# Altium PCB SpeedControlPID.PcbDoc
Units mil, origin at the board's own origin, x right, y up, seen from the top; angles counter-clockwise.
Board outline 2100 x 2900 mil, 2 copper layers (Top Layer, Bottom Layer); 54 components, 40 nets, 190 pads, 103 vias.
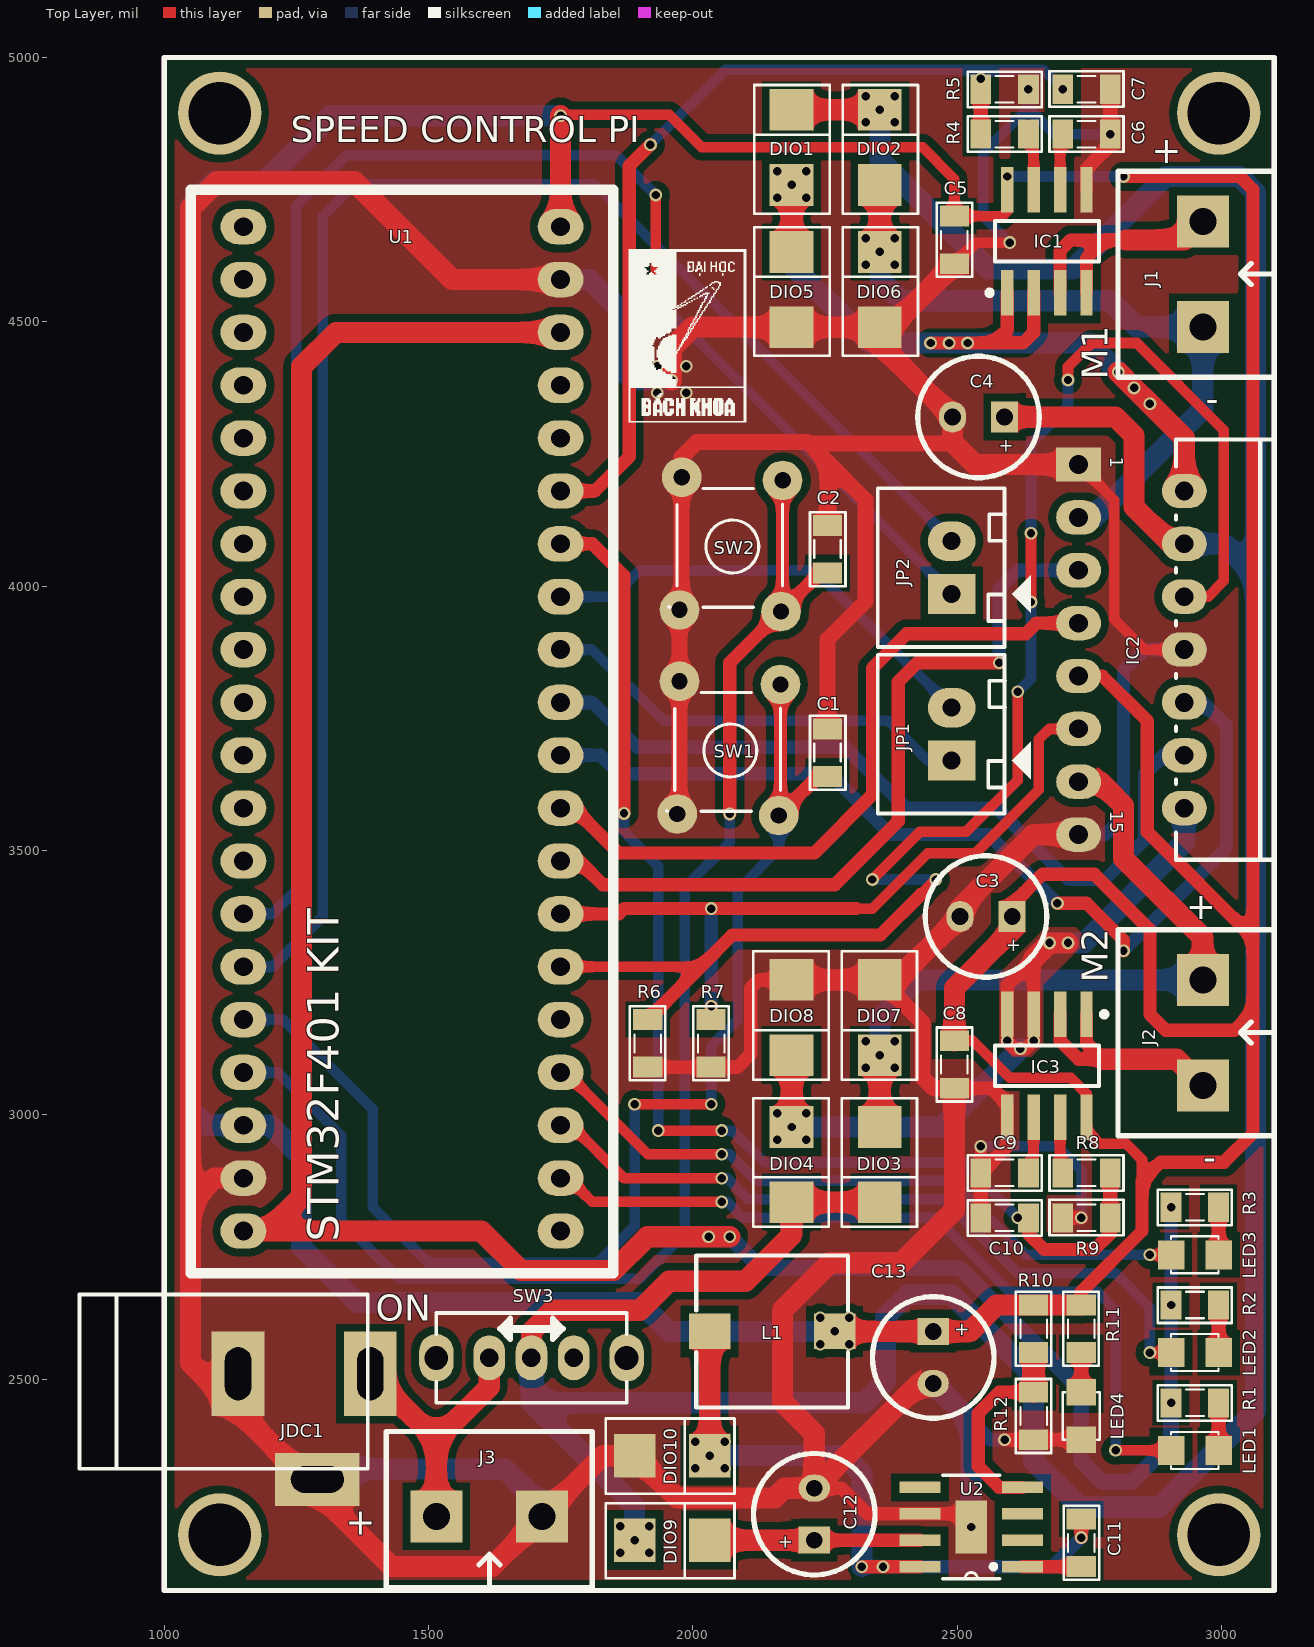
[diagram p0: Top Layer view]
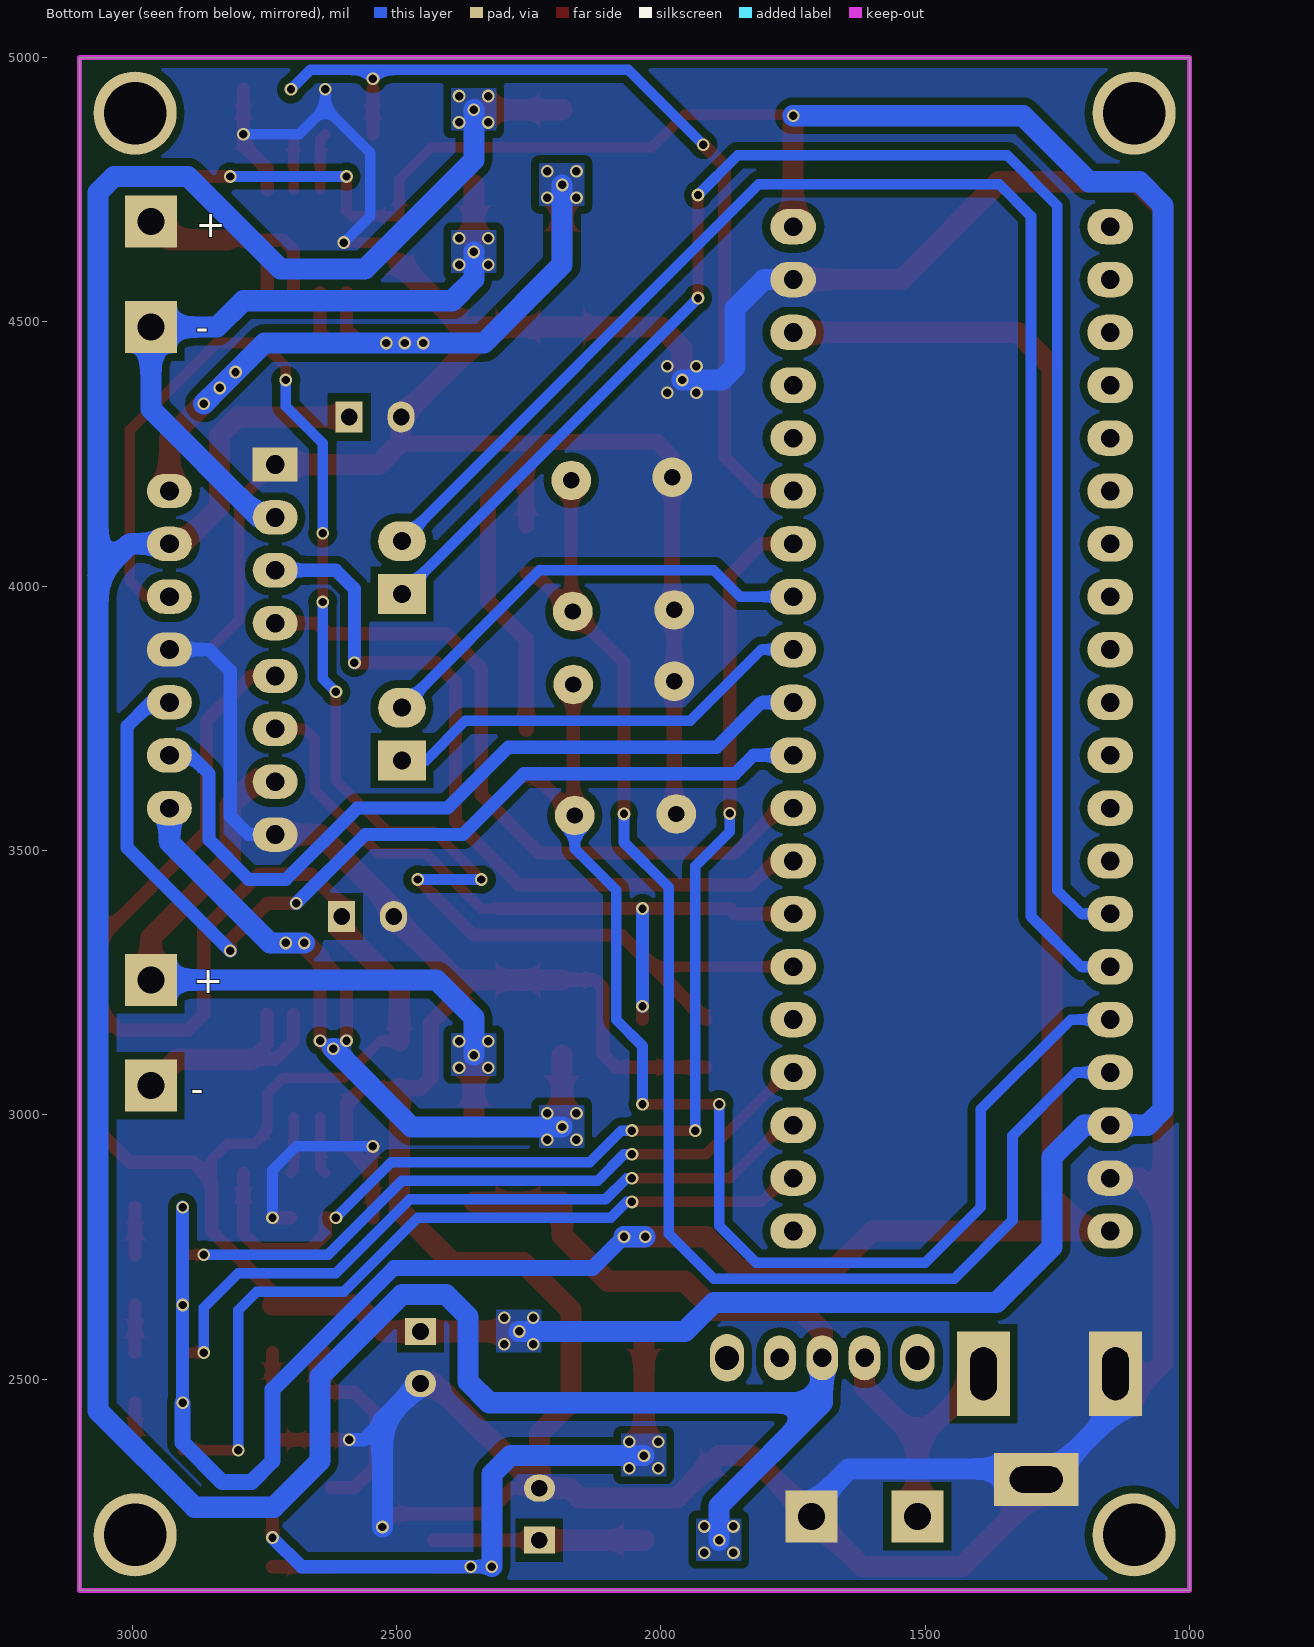
[diagram p1: Bottom Layer view, seen from below]
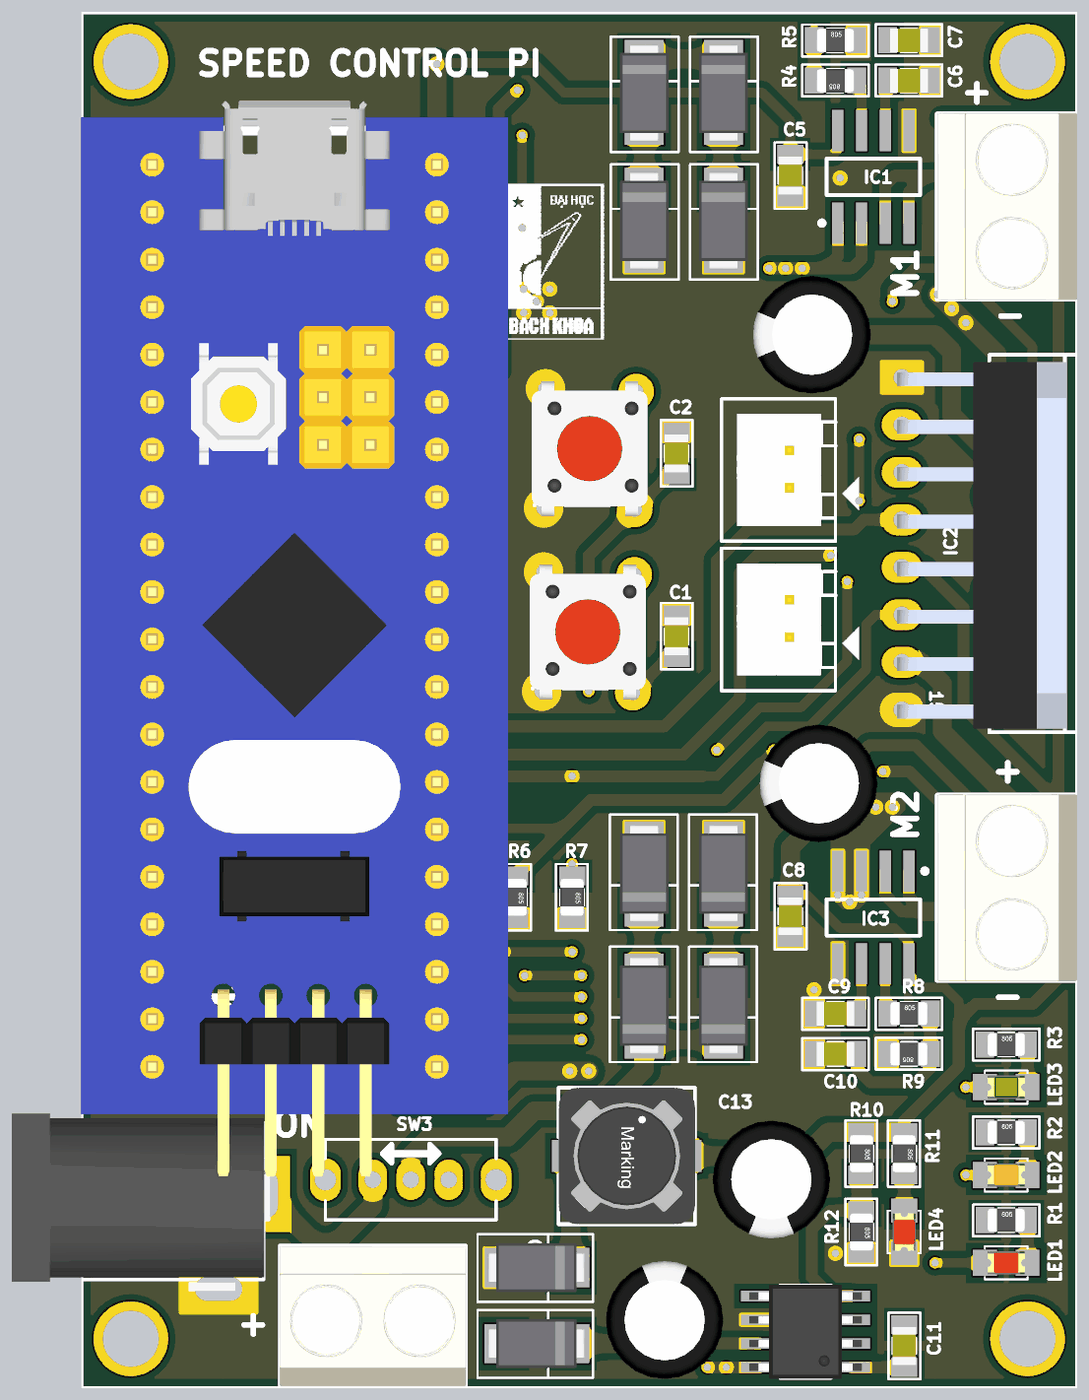
[diagram p2: 3D render of the assembled board from above, using the file's embedded part models]

## Layer stack, top to bottom
Top Solder: solder mask 0.4, Solder Resist, Dk 3.5
Top Layer: signal copper 1.4
Dielectric 1: dielectric 12.6, FR-4, Dk 4.8
Bottom Layer: signal copper 1.4
Bottom Solder: solder mask 0.4, Solder Resist, Dk 3.5

## Board outline
1000,2100 1000,5000 3100,5000 3100,2100

## Design rules (kind name [scope] priority, off if disabled: settings)
Clearance [All] p1: gap=15 ignorepadtopadclearanceinfootprint=TRUE except(0: Arc-Text Arc-Hole Track-Text Track-Hole SMDPad-Text SMDPad-Hole THPad-Text THPad-Hole Via-Text Via-Hole Fill-Text Fill-Hole Poly-Text Poly-Hole Region-Text Region-Hole Text-Text Text-Hole; 7: Arc-Arc Arc-Track Arc-SMDPad Track-Track Track-SMDPad SMDPad-SMDPad)
PolygonConnect [All] p1: connectstyle=Direct reliefconductorwidth=10 reliefentries=4 polygonreliefangle="90 Angle" airgapwidth=10
RoutingVias [All] p1: holewidth=16 width=24 viastyle="Through Hole" minholewidth=16 minwidth=24 maxholewidth=18 maxwidth=26
SolderMaskExpansion [All] p1: expansion=4
Width [All] p1: maxlimit=40 minlimit=10 preferedwidth=20
30 further rules are at their usual default settings.

## Classes and differential pairs
component class U_POWER: C11 C12 C13 DIO9 DIO10 J3 JDC1 L1 LED4 R10 R11 R12 SW3 U2
component class U_MOTOR: C3 C4 C5 C6 C7 C8 C9 C10 DIO1 DIO2 DIO3 DIO4 DIO5 DIO6 DIO7 DIO8 IC1 IC2 IC3 J1 J2 JP1 JP2 R4 R5 R6 R7 R8 R9
component class U_MCU: C1 C2 LED1 LED2 LED3 R1 R2 R3 SW1 SW2 U1

## Components (designator, comment, footprint, x,y, rotation, side; value= is the part's Value field where it differs from the comment)
C1 "10uF" CAP_0805 2255,3685 r90 top value=33p
C2 "10uF" CAP_0805 2255,4070 r90 top value=33p
C3 "220uF/16V" C8mm 2555,3375 r180 top
C4 "220uF/25V" C8mm 2540.79,4320 r180 top
C5 "100nF" CAP_0805 2495,4655 r90 top value=33p
C6 "10nF" CAP_0805 2745,4855 r180 top value=33p
C7 "100nF" CAP_0805 2745,4940 r180 top value=33p
C8 "100nF" CAP_0805 2495,3095 r90 top value=33p
C9 "10nF" CAP_0805 2590,2890 r0 top value=33p
C10 "100nF" CAP_0805 2590,2805 r0 top value=33p
C11 "10nF" CAP_0805 2735,2190 r90 top value=33p
C12 "220uF/25V" C8mm 2230,2244.21 r90 top
C13 "220uF/16V" C8mm 2455,2540.79 r270 top
DIO1 "Diode SMD" DIO-214AC(SMA) 2190,4808 r270 top value=1N5007
DIO2 "Diode SMD" DIO-214AC(SMA) 2357,4808 r270 top value=1N5007
DIO3 "Diode SMD" DIO-214AC(SMA) 2351,2927.8 r90 top value=1N5007
DIO4 "Diode SMD" DIO-214AC(SMA) 2184,2927.8 r90 top value=1N5007
DIO5 "Diode SMD" DIO-214AC(SMA) 2190,4539 r270 top value=1N5007
DIO6 "Diode SMD" DIO-214AC(SMA) 2357,4539 r270 top value=1N5007
DIO7 "Diode SMD" DIO-214AC(SMA) 2351,3206 r90 top value=1N5007
DIO8 "Diode SMD" DIO-214AC(SMA) 2184,3206 r90 top value=1N5007
DIO9 "SS34" DIO-214AC(SMA) 1939,2192 r180 top value=1N5007
DIO10 "SS34" DIO-214AC(SMA) 1939,2352 r180 top value=1N5007
IC1 "ACS712" SOIC-8 2670,4652.44 r90 top
IC2 "L298" DIP15SL2 2830,3880 r270 top
IC3 "ACS712" SOIC-8 2670,3092.56 r270 top
J1 "KF2" KF2-5.08 2965,4590 r270 top
J2 "KF2" KF2-5.08 2965,3155 r270 top
J3 "KF2" KF2-5.08 1615,2240 r180 top
JDC1 "Jac DC" DC-IN 1265,2410 r0 top
JP1 "JP2" CON2 2490,3670 r90 top value="Connector 2"
JP2 "JP2" CON2 2490,3985 r90 top value="Connector 2"
L1 "22uH" L-SMD-M-7.3x4.5 2150.31,2590 r90 top value="150 mH"
LED1 "LED" LED-0805-Red 2995,2365 r180 top value="LED 3 ly Single Colour"
LED2 "LED" LED-0805-Orange 2995,2550 r180 top value="LED 3 ly Single Colour"
LED3 "LED" LED-0805-Green 2995,2735 r180 top value="LED 3 ly Single Colour"
LED4 "LED" LED-0805-Red 2735,2475 r270 top value="LED 3 ly Single Colour"
R1 "1k" RES-SMD-0805 2950,2455 r0 top
R2 "1k" RES-SMD-0805 2950,2640 r0 top
R3 "1k" RES-SMD-0805 2950,2825 r0 top
R4 "5k6" RES-SMD-0805 2590,4855 r180 top
R5 "10k" RES-SMD-0805 2590,4940 r0 top
R6 "10k" RES-SMD-0805 1915,3135 r270 top
R7 "10k" RES-SMD-0805 2035,3135 r270 top
R8 "5k6" RES-SMD-0805 2745,2890 r0 top
R9 "10k" RES-SMD-0805 2745,2805 r180 top
R10 "10k" RES-SMD-0805 2645,2595 r270 top
R11 "1k" RES-SMD-0805 2735,2595 r270 top
R12 "3k3" RES-SMD-0805 2645,2430 r270 top
SW1 "SW" SW4 2166,3814 r270 top value="Button chip 4 pin"
SW2 "SW" SW4 2170,4200 r270 top value="Button chip 4 pin"
SW3 "SW102A" SW102 1775,2540 r180 top value="Switch 102 On Board"
U1 "STM32F401CCU6 kit" "STM32F401 KIT" 1470,3830 r0 top
U2 "TPS5430" ESOP-8 2527,2220 r180 top

## Footprints (in the part's own frame and the unit in brackets; to place one, negate y for a bottom-side part, rotate by r counter-clockwise, add the part's x,y. Pads: shape width x height; smd on the part's side, far side on the other; paste and mask are expansions set on the pad)
C8mm [mm]
  rect 1.3x1.5 hole 0.8: 1(-1.25,0)
  oval 1.3x1.5 hole 0.8: 2(1.25,0)
  silkscreen extent -2.92,-2.92 2.92,2.92, body extent -3.15,-3.15 3.16,3.15, height 11.51
CAP_0805 [mil]
  rect 39.37x55 smd: 1(-45,0) 2(45,0)
  silkscreen extent -70,-34 70,33, body extent -40,-25 40,25, height 24
CON2 [mil] "CON2"
  rect 75x90 hole 34: 1(0,0)
  oval 75x90 hole 34: 2(100,0)
  silkscreen extent -100,-150 200,140, body extent -68,-70 168,107, height 236
DC-IN [mil] "Jac DC input"
  rect 100x160 hole 50 slot 100 at 90 deg: 1(125,100) 2(-125,100)
  rect 160x100 hole 50 slot 100 at 0 deg: 3(25,-100)
  silkscreen extent -425,-80 120,250, body extent -410,-105 134,269, height 434
DIO-214AC(SMA) [mm] "DO-214AC Diode Smallest Size"
  rect 2x2.1 smd: 1(1.245,-0.076) 2(-2.367,-0.076)
  silkscreen extent -3.56,-1.86 2.62,1.76, body extent -3.13,-1.38 2.07,1.22, height 2.4
DIP15SL2 [mil] "TO, Thru-Hole, Vertical, Heatsink Mounted; 15 Bent Staggered Leads; Pitch 1.27 mm"
  rect 65x85 hole 35.43: 1(-350,-100)
  oval 65x85 hole 35.43: 2(-300,100) 3(-250,-100) 4(-200,100) 5(-150,-100) 6(-100,100) 7(-50,-100) 8(0,100) 9(50,-100) 10(100,100) 11(150,-100) 12(200,100) 13(250,-100) 14(300,100) 15(350,-100)
  silkscreen extent -398,84 398,269, body extent -382,-110 390,247, height 895
ESOP-8 [mil]
  rect 78x22 smd: 1(-97,75) 2(-97,25) 3(-97,-25) 4(-97,-75) 5(97,-75) 6(97,-25) 7(97,25) 8(97,75)
  rect 60x100 smd: 9(0,0)
  Top Layer region: -190,-20
  silkscreen extent -54,-98 54,98, body extent -119,-99 119,99, height 63
KF2-5.08 [mm]
  rect 2.5x2.5 hole 1.3: 1(-2.54,0) 2(2.54,0)
  silkscreen extent -4.95,-4.08 4.95,3.43, body extent -5,-4.07 5,3.43, height 10
L-SMD-M-7.3x4.5 [mm] "WE-PDA SMD Shielded Power Inductor, 7345"
  rect 1.7x2 smd: 1(0,3) 2(0,-3)
  silkscreen extent -3.65,-3.65 3.65,3.65, body extent -3.65,-3.65 3.65,3.65, height 4.05
LED-0805-Green [mil]
  rect 50x55 smd: 1(0,0) 2(90,0)
  silkscreen extent 0,-35 90,35, body extent 5,-25 85,25, height 43
LED-0805-Orange [mil]
  rect 50x55 smd: 1(0,0) 2(90,0)
  silkscreen extent 0,-35 90,35, body extent 5,-25 85,25, height 43
LED-0805-Red [mil]
  rect 50x55 smd: 1(0,0) 2(90,0)
  silkscreen extent 0,-35 90,35, body extent 5,-25 85,25, height 43
RES-SMD-0805 [mil]
  rect 39.37x55 smd: 1(-45,0) 2(45,0)
  silkscreen extent -70,-34 70,33, body extent -39,-25 39,25, height 31
SOIC-8 [mm] "SOIC, 8-Leads, Body 5,0x4,0mm (max), Pitch 1,27mm, IPC Medium Density"
  rect 2.2x0.6 smd: 1(-2.475,1.905) 2(-2.475,0.635) 3(-2.475,-0.635) 4(-2.475,-1.905) 5(2.475,-1.905) 6(2.475,-0.635) 7(2.475,0.635) 8(2.475,1.905)
  silkscreen extent -2.6,-2.5 0.98,2.88, body extent -3.2,-2.5 3.2,2.5, height 1.75
"STM32F401 KIT" [mm]
  oval 2.2x1.7 hole 0.9: 1(-8.128,21.59) 2(-8.128,19.05) 3(-8.128,16.51) 4(-8.128,13.97) 5(-8.128,11.43) 6(-8.128,8.89) 7(-8.128,6.35) 8(-8.128,3.81) 9(-8.128,1.27) 10(-8.128,-1.27) 11(-8.128,-3.81) 12(-8.128,-6.35) 13(-8.128,-8.89) 14(-8.128,-11.43) 15(-8.128,-13.97) 16(-8.128,-16.51) 17(-8.128,-19.05) 18(-8.128,-21.59) 19(-8.128,-24.13) 20(-8.128,-26.67) 21(7.112,-26.67) 22(7.112,-24.13) 23(7.112,-21.59) 24(7.112,-19.05) 25(7.112,-16.51) 26(7.112,-13.97) 27(7.112,-11.43) 28(7.112,-8.89) 29(7.112,-6.35) 30(7.112,-3.81) 31(7.112,-1.27) 32(7.112,1.27) 33(7.112,3.81) 34(7.112,6.35) 35(7.112,8.89) 36(7.112,11.43) 37(7.112,13.97) 38(7.112,16.51) 39(7.112,19.05) 40(7.112,21.59)
  silkscreen extent -10.67,-28.7 9.65,23.37, body extent -11.94,-32.59 10.92,24.97, height 19.77
SW4 [mil] "SW button 4pin, 250 x250 mil"
  round 75 hole 31: 1(0,0) 2(245,-195) 3(248,-3) 4(-6,-191)
  silkscreen extent 15,-215 240,0, body extent -36,-220 276,24, height 276
SW102 [mil] "Switch 102 On Board nho"
  oval 60x85 hole 35: 1(0,0) 2(80,0) 3(160,0)
  oval 65x90 hole 45: 4(260,0) 5(-100,0)
  silkscreen extent -100,-85 260,85

## Part data
C1 C2 C5 C6 C7 C8 C9 C10 C11: library part CapSMD, "Capacitor", LatestRevisionDate=17-Jul-2002, LatestRevisionNote="Re-released for DXP Platform.", PackageReference=RAD-0.3, Published=8-Jun-2000, Publisher="Altium Limited"
C3 C4 C12 C13: library part "Cap Pol", "Polarized Capacitor (Axial)", LatestRevisionDate=17-Jul-2002, LatestRevisionNote="Re-released for DXP Platform.", PackageReference=POLAR0.8, Published=8-Jun-2000, Publisher="Altium Limited"
DIO1 DIO2 DIO3 DIO4 DIO5 DIO6 DIO7 DIO8: "Default Diode", Code - JEDEC=DO-214-AB, Published=8-Jun-2000, Publisher="Altium Limited", Revision="July-2002: Re-released for DXP Platform."
DIO9 DIO10: library part "Diode SMD", "Default Diode", Code - JEDEC=DO-214-AB, Published=8-Jun-2000, Publisher="Altium Limited", Revision="July-2002: Re-released for DXP Platform."
IC2: "Dual Full-H Driver", ComponentLink1Description="Manufacturer Link", ComponentLink1URL=http://www.ti.com/, DatasheetVersion=Jun-1990, Note="The tab is elec is connected to GND pin", PackageDescription="TO, Thru-Hole, Vertical, Heatsink Mounted; 15 Bent Staggered Leads; Pitch 1.27 mm", PackageReference=KV015, Published=15-May-2002, Publisher="Altium Limited"
J1 J2 J3: Manufacturer="Würth Elektronik eiSos GmbH", partNo=691103110002, ComponentLink1 Description=Manufacturer, ComponentLink1URL=http://www.we-online.com, ComponentLink2 Description=Datasheet, ComponentLink2URL=http://katalog.we-online.de/em/datasheet/6911031100xx.pdf, Created by="Karrer Zheng", Created Date="29 October 2013", NoPins=2
JDC1: library part DCIN, "Jac DC input"
JP1 JP2: library part Con2, "Connector 2"
L1: library part Inductor, "Inductor"
LED1 LED2 LED3 LED4: "LED Single colour Green and Red"
R1 R2 R3 R4 R5 R6 R7 R8 R9 R10 R11 R12: library part "Resistor - SMD", "Resistor SMD", Manufacturer="Generic Components", Class=Passive, Published=08/06/2000, Publisher="Altium Hobart Technology Centre"
SW1 SW2: library part SW4, "Switch button 4 pin"
SW3: "Switch 102 on Broad"
U1: library part STM32F401CCU6, "STM32F401CCU6 breakout board. STM32 ARM-based 32-bit MCU"
U2: Name=TPS5430

## Free pads (board coordinates)
  round 157.48 hole 118.11: 0(1105,2205) 0(1105,4895) 0(2995,2205) 0(2995,4895)

## Via types
v1: diameter 24, hole 16, Top Layer to Bottom Layer, 103 vias

## Nets (pads, with @x,y where several pads share a name; then routed paths per layer and width w, separated by ;. In a path a pad name is that pad's centre, name@x,y a point inside that pad or via, vN(x,y) a via of type N, cw(c..) or ccw(c..) an arc to the next point about the centre after c; other vN are vias at no path point)
3V3: R1.1 R2.1 R3.1 U1.20 U1.38 | length 4778.8
  Top Layer w40: U1.20 1195,2780 ; U1.38 1325,4480 1260,4415 1260,2845 1195,2780 ; v1(2070,2769) v1(2030,2769) 1914,2769 1850,2705 1675,2705 1600,2780 1195,2780
  Bottom Layer w25: v1(2905,2455) v1(2905,2640) v1(2905,2825)
  Bottom Layer w30: v1(2070,2769) 2129,2710 2505,2710 2735,2480 2735,2345 2775,2305 2830,2305 2905,2380 v1(2905,2455)
  Bottom Layer w40: v1(2030,2769) v1(2070,2769)
5V: C3.1 C5.2 C8.2 C13.1 IC1.8 IC2.9 IC3.8 L1.2 R10.1 R11.1 U1.18 U1.40 | length 10695.6
  Top Layer w20: v1(1750,4890) 1752,4892 1955.33,4892 2017.33,4830 2435,4830 2495,4770 C5.2 2585,4700 2595,4710 IC1.8 v1(2595,4775) ; C8.2 2530,3140 2600,3070 2715,3070 2745,3040 IC3.8 2745,2970 2770,2945 2820,2945 2850,2915 2850,2875
  Top Layer w25: C3.1 2604.21,3397.71 2661.5,3455 2760,3455 2865,3350 2865,3190 2895,3160 3025,3160 3060,3195 ; IC2.9 2775,3830 2860,3745 2860,3535 3060,3335 ; R11.1 2735,2665 2850,2780 2850,2875 2885,2910 3005,2910 3060,2965 3060,3195 ; v1(2815,4775) 3035,4775 3060,4750 3060,3335 ; 3060,3195 3060,3335
  Top Layer w40: U1.40 v1(1750,4890) ; v1(2268.43,2590) C13.1 2525,2590 2575,2640 R11.1 ; C8.2 2495,3240 2604.21,3349.21 C3.1
  Bottom Layer w20: v1(2595,4775) v1(2815,4775)
  Bottom Layer w40: v1(1750,4890) 1315,4890 1190,4765 1095,4765 1050,4720 1050,3010 1080,2980 U1.18 1200,2980 1260,2920 1260,2750 1365,2645 1900,2645 1955,2590 v1(2268.43,2590)
  other v1: 2241.43,2566 2296.43,2566 2241.43,2616 2296.43,2616
ADC_I_1: C10.2 R8.2 R9.1 U1.34 | length 2315
  Top Layer w20: v1(1935,2970) v1(2055,2970) ; v1(2615,2805) C10.2
  Top Layer w25: U1.34 1810,4080 1870,4020 v1(1870,3570) ; C10.2 2635,2775 2665,2745 2760,2745 2790,2775 R9.1 R8.2
  Bottom Layer w20: v1(1870,3570) 1870,3535 1935,3470 v1(1935,2970) ; v1(2055,2970) 2075,2970 2135,2910 2510,2910 v1(2615,2805)
ADC_I_2: C7.2 R4.2 R5.1 U1.35 | length 1750.7
  Top Layer w25: U1.35 1815,4180 1880,4245 1880,4795 v1(1920,4835) ; R4.2 R5.1
  Bottom Layer w20: v1(1920,4835) 2062,4977 2528,4977 ; v1(2700,4940) 2663,4977 2562,4977 ; 2528,4977 2562,4977 ; 2528,4977 v1(2545,4960) 2562,4977
BT1: C1.1 SW1.1 SW1.3 U1.16 | length 2409.6
  Top Layer w20: v1(1890,3020) v1(2035,3020)
  Top Layer w25: SW1.3 SW1.3@2166,3569 ; SW1.1 SW1.3@2166,3569 ; C1.1 2237,3640 SW1.3@2166,3569
  Bottom Layer w20: U1.16 1225,3180 1395,3010 1395,2825 1500,2720 1820,2720 1890,2790 v1(1890,3020) ; v1(2035,3020) 2035,3130 2085,3180 2085,3425 2163,3503 SW1.3
BT2: C2.1 SW2.1 SW2.3 U1.17 | length 2741.1
  Top Layer w25: v1(2070,3569) 2070,3855 SW2.3 SW2.3@2170,3955 ; SW2.1 SW2.3@2170,3955 ; C2.1 2240,4025 SW2.3@2170,3955
  Bottom Layer w20: U1.17 1215,3080 1335,2960 1335,2800 1445,2690 1900,2690 1985,2775 1985,3430 2070,3515 v1(2070,3569)
ENCODER_A1: JP1.1 U1.32 | length 827
  Bottom Layer w20: U1.32 1810,3880 1945,3745 2370,3745 2445,3670 JP1.1
ENCODER_A2: JP2.1 U1.14 | length 3151
  Top Layer w20: v1(1930,4545) v1(1930,4740)
  Bottom Layer w20: U1.14 1205,3380 1250,3425 1250,4720 1345,4815 1855,4815 v1(1930,4740) ; v1(1930,4545) JP2.1
ENCODER_B1: JP1.2 U1.33 | length 868.4
  Bottom Layer w20: U1.33 1850,3980 1900,4030 2230,4030 JP1.2
ENCODER_B2: JP2.2 U1.15 | length 3008.8
  Bottom Layer w20: U1.15 1205,3280 1300,3375 1300,4700 1360,4760 1815,4760 JP2.2
FB1: R10.2 R12.1 U2.4 | length 397.1
  Top Layer w25: U2.4 2580,2295 2540,2335 2540,2435 2580,2475 R12.1
  Top Layer w40: R12.1 R10.2
GND: C1.2 C2.2 C3.2 C4.2 C5.1 C6.1 C7.1 C8.1 C9.1 C10.1 C12.2 C13.2 DIO5.1 DIO6.1 DIO7.1 DIO8.1 DIO10.1 IC1.5 IC2.1 IC2.8 IC2.15 IC3.5 J3.1 JDC1.2 JDC1.3 LED4.2 R5.2 R6.2 R7.2 R9.2 R12.2 SW1.2 SW1.4 SW2.2 SW2.4 U1.19 U1.39 U2.6 U2.9 | length 14979.2
  Top Layer w20: C5.1 2535,4650 v1(2600,4650) ; C9.1 v1(2545,2940) ; IC2.1 2797.5,4162.5 2797.5,3937.5 2855,3880 IC2.8
  Top Layer w25: R6.2 R7.2 2085,3090 2110,3115 2110,3240 2125,3255 DIO8.1 ; C12.2 2281.57,2293.43 2330,2245 U2.6 2502,2245 v1(2527,2220) ; C8.1 2565,3050 2595,3020 IC3.5 2595,2940 C9.1 C10.1 ; v1(2590,2385) R12.2 LED4.2 ; R9.2 v1(2735,2805) ; IC1.5 2745,4790 2790,4835 v1(2790,4855) C7.1
  Top Layer w30: SW1.2 1975,3573 SW1.4 SW2.2 1979,3959 SW2.4 1979,4244 2007.43,4272.43 2217.57,4272.43 2220,4270 ; C1.2 2255,3899 2327,3971 2327,4163 2255,4235 ; C2.2 2255,4235 ; DIO7.1 2435,3174 2435,3070 2455,3050 C8.1 ; 2491.57,4272.43 2489.15,4270 2220,4270 ; 2220,4270 2255,4235
  Top Layer w40: JDC1.2 JDC1.2@1140,2440 ; U1.19 1095,2880 1050,2835 ; U1.39 1545,4580 1360,4765 1100,4765 1050,4715 1050,2835 ; v1(1960,4390) 1960,4450 2000,4490 DIO5.1 DIO6.1 ; DIO8.1 DIO7.1 2385.79,3255 C3.2 2505.79,3390.79 2645,3530 IC2.15 ; C13.2 2428.15,2491.57 C12.2 ; C8.1 2495,2820 2395,2720 2260,2720 2170,2630 2170,2457 2230,2397 C12.2 ; C5.1 2375,4490 DIO6.1 ; IC2.1 2534,4230 2491.57,4272.43 C4.2 2354,4457.57 DIO6.1 ; 1050,2835 1050,2530 JDC1.2@1140,2440 ; JDC1.2@1140,2440 1270,2310 JDC1.3 1290,2285 1430,2145 1620,2145 J3.1 1830,2355 DIO10.1 1970,2275 2155,2275 2173.43,2293.43 C12.2
  Bottom Layer w20: v1(2545,2940) 2690,2940 2735,2895 v1(2735,2805) ; v1(2600,4650) 2550,4700 2550,4819.89 2635,4904.89 ; v1(2635,4940) 2635,4904.89 ; v1(2790,4855) 2684.88,4855 2635,4904.89
  Bottom Layer w25: 2527,2419.57 2561.58,2385 v1(2590,2385) ; IC2.15 2780,3530 2815,3565 2815,3840 2855,3880 IC2.8
  Bottom Layer w40: JDC1.2 1140,2440 1270,2310 JDC1.3 1310,2330 1645,2330 1715,2260 J3.1 ; U1.39 1805,4580 1860,4525 1860,4415 1885,4390 v1(1960,4390) ; C13.2 2527,2419.57 v1(2527,2220)
  other v1: 1933,4366 1988,4366 1933,4416 1988,4416
LED: LED1.2 U1.22 | length 1527.7
  Top Layer w20: U1.22 1765,2880 1810,2835 v1(2055,2835) ; v1(2800,2365) 2895,2365 2900,2370 LED1.2
  Bottom Layer w20: v1(2055,2835) 2065,2835 2095,2805 2460,2805 2600,2665 2765,2665 2800,2630 v1(2800,2365)
LED1: LED2.2 U1.23 | length 1382.9
  Top Layer w20: U1.23 1770,2980 1870,2880 v1(2055,2880) ; v1(2865,2550) LED2.2
  Bottom Layer w20: v1(2055,2880) 2065,2880 2105,2840 2475,2840 2615,2700 2800,2700 2865,2635 v1(2865,2550)
LED2: LED3.2 U1.24 | length 1297.9
  Top Layer w20: U1.24 1760.12,3080 1915.12,2925 v1(2055,2925) ; v1(2865,2735) LED3.2
  Bottom Layer w20: v1(2055,2925) 2070,2925 2120,2875 2490,2875 2630,2735 v1(2865,2735)
MOTOR_DIR1: IC2.5 U1.28 | length 1481.8
  Top Layer w25: U1.28 1785,3480 1830,3435 2269,3435 2389,3555 2389,3819 2425,3855 v1(2580,3855)
  Bottom Layer w25: v1(2580,3855) 2580,3995 2615,4030 IC2.5
MOTOR_DIR2: IC2.7 U1.29 | length 1336
  Top Layer w25: U1.29 1775,3580 1860,3495 2230,3495 2340,3605 2340,3845 2405,3910 2630,3910 2650,3930 IC2.7
MOTOR_DIR3: IC2.10 U1.30 | length 1834.4
  Top Layer w25: v1(2690,3400) 2745,3400 2815,3330 v1(2815,3310)
  Bottom Layer w25: U1.30 1825,3680 1860,3645 2260,3645 2375,3530 2560,3530 v1(2690,3400) ; v1(2815,3310) 3010,3505 3010,3735 2965,3780 IC2.10
MOTOR_DIR4: IC2.12 U1.31 | length 1489.3
  Bottom Layer w25: U1.31 1810,3780 1895,3695 2289,3695 2404,3580 2575,3580 2710,3445 2780,3445 2855,3520 2855,3645 2890,3680 IC2.12
NetC6_2: C6.2 IC1.6 | length 107.2
  Top Layer w20: IC1.6 2695,4850 C6.2
NetC9_2: C9.2 IC3.6 | length 109.3
  Top Layer w20: C9.2 2645,2900 IC3.6
NetC11_1: C11.1 U2.1 | length 111
  Top Layer w25: U2.1 C11.1
NetC11_2: C11.2 DIO10.2 L1.1 U2.8 | length 1295.1
  Top Layer w25: v1(2320,2145) v1(2360,2145) U2.8 ; v1(2735,2200) C11.2
  Top Layer w40: v1(2032.2,2355) L1.1
  Bottom Layer w25: v1(2320,2145) v1(2360,2145) 2680,2145 v1(2735,2200)
  Bottom Layer w40: v1(2032.2,2355) 2285,2355 2320,2320 v1(2320,2145)
  other v1: 2005.2,2331 2060.2,2331 2005.2,2381 2060.2,2381
NetC12_1: C12.1 DIO9.2 U2.7 | length 397.8
  Top Layer w25: C12.1 U2.7
  Top Layer w40: DIO9.2 C12.1
NetDIO1_1: DIO1.1 DIO5.2 IC1.1 IC1.2 IC2.2 | length 1725.1
  Top Layer w25: v1(2450,4460) v1(2485,4460) v1(2520,4460) 2570,4460 ; IC1.1 2595,4485 2570,4460 ; IC1.2 2645,4480 2625,4460 2570,4460
  Top Layer w40: DIO5.2 v1(2187,4759) ; v1(2805,4405) v1(2835,4375) v1(2865,4345) 2930,4280 IC2.2
  Bottom Layer w40: v1(2187,4759) 2187,4608 2335,4460 v1(2450,4460) v1(2485,4460) v1(2520,4460) 2750,4460 v1(2805,4405) v1(2835,4375) v1(2865,4345)
  other v1: 2160,4735 2215,4735 2160,4785 2215,4785
NetDIO2_1: DIO2.1 DIO6.2 IC2.3 J1.2 | length 1301.6
  Top Layer w40: v1(2354,4632.2) DIO2.1
  Bottom Layer w40: v1(2354,4632.2) 2354,4581 2395,4540 2790,4540 2840,4490 J1.2 2965,4335 2760,4130 IC2.3
  other v1: 2327,4608.2 2382,4608.2 2327,4658.2 2382,4658.2
NetDIO3_1: DIO3.1 DIO7.2 IC2.13 J2.1 | length 1343.4
  Top Layer w40: DIO3.1 v1(2354,3112.8) ; IC2.13 2770,3630 2815,3585 2815,3485 2965,3335 J2.1
  Bottom Layer w40: v1(2354,3112.8) 2354,3184 2425,3255 J2.1
  other v1: 2327,3088.8 2382,3088.8 2327,3138.8 2382,3138.8
NetDIO4_1: DIO4.1 DIO8.2 IC2.14 IC3.3 IC3.4 | length 1499.7
  Top Layer w25: v1(2595,3140) IC3.4 2595,3245 2645,3295 IC3.3 v1(2645,3140) 2630,3125 v1(2620,3125) 2610,3125 v1(2595,3140)
  Top Layer w40: v1(2187,2976.8) DIO8.2 ; 2645,3295 v1(2675,3325) v1(2710,3325)
  Bottom Layer w40: v1(2187,2976.8) 2471.8,2976.8 v1(2620,3125) ; v1(2675,3325) v1(2710,3325) 2740,3325 2930,3515 IC2.14
  other v1: 2160,2952.8 2215,2952.8 2160,3002.8 2215,3002.8
NetIC1_3: IC1.3 IC1.4 J1.1 | length 487.3
  Top Layer w25: IC1.3 2695,4635 2715,4655 2780,4655 ; IC1.4 2745,4620 2780,4655 ; 2820,4655 2780,4655
  Top Layer w40: 2820,4655 2930,4655 J1.1
NetIC1_7: IC1.7 R4.1 | length 109.3
  Top Layer w20: R4.1 2645,4845 IC1.7
NetIC3_1: IC3.1 IC3.2 J2.2 | length 452.6
  Top Layer w25: IC3.2 2695,3140 2730,3105 2775,3105 2745,3135 IC3.1
  Top Layer w40: 2775,3105 2915,3105 J2.2
NetIC3_7: IC3.7 R8.1 | length 107.2
  Top Layer w20: IC3.7 2695,2895 R8.1
NetJ3_2: J3.2 JDC1.1 SW3.3 | length 518.2
  Top Layer w40: JDC1.1 1515,2385 ; J3.2 1515,2385 ; SW3.3 1615,2485 1515,2385
NetLED1_1: LED1.1 R1.2 | length 90
  Top Layer w25: LED1.1 R1.2
NetLED2_1: LED2.1 R2.2 | length 90
  Top Layer w25: LED2.1 R2.2
NetLED3_1: LED3.1 R3.2 | length 90
  Top Layer w25: LED3.1 R3.2
NetLED4_1: LED4.1 R11.2 | length 75
  Top Layer w25: LED4.1 R11.2
PWM1: IC2.6 R6.1 U1.26 | length 2975.5
  Top Layer w20: U1.26 2015,3280 2020,3285 ; v1(2340,3445) 2430,3535 2517,3535 2615,3633 v1(2615,3800) ; 2432.5,3417.5 v1(2460,3445) ; v1(2640,3970) v1(2640,4100) ; v1(2710,4390) 2710,4415 2755,4460 2840,4460 3005,4295 3005,4010 2975,3980 IC2.6
  Top Layer w25: R6.1 2015,3280 2075,3340 2355,3340 2432.5,3417.5
  Bottom Layer w20: v1(2340,3445) v1(2460,3445) ; v1(2615,3800) 2640,3825 v1(2640,3970) ; v1(2640,4100) 2640,4270 2710,4340 v1(2710,4390)
PWM2: IC2.11 R7.1 U1.27 | length 1405.6
  Top Layer w20: 2310,3390 2340,3390 2445,3495 2535,3495 2655,3615 2655,3710 2675,3730 IC2.11 IC2.11@2745,3730
  Top Layer w25: U1.27 1860,3380 1870,3390 v1(2035,3390) 2310,3390 ; R7.1 v1(2035,3205)
  Bottom Layer w25: v1(2035,3205) v1(2035,3390)
VIN: C4.1 DIO1.2 DIO2.2 DIO3.2 DIO4.2 DIO9.1 IC2.4 SW3.2 | length 7262.3
  Top Layer w40: SW3.2 1695,2590 1735,2630 1900,2630 1955,2685 2100,2685 2187,2772 DIO4.2 DIO3.2 ; DIO1.2 v1(2354,4901.2) ; C4.1 2800,4320 2835,4285 2835,4150 2905,4080 IC2.4
  Bottom Layer w40: SW3.2 1695,2455 ; v1(1890,2195) 1890,2260 1695,2455 ; v1(2354,4901.2) 2354,4806 2560,4600 2720,4600 2895,4775 3035,4775 3065,4745 3065,4020 ; IC2.4 3005,4080 3065,4020 ; 1695,2455 2325,2455 2365,2495 2365,2618 2407,2660 2489.62,2660 2645,2504.62 2645,2345 2732.5,2257.5 2882.5,2257.5 3065,2440 3065,4020
  other v1: 1863,2171 1918,2171 1863,2221 1918,2221 2327,4877.2 2382,4877.2 2327,4927.2 2382,4927.2
pads on no net: SW3.1 SW3.4 SW3.5 U1.1 U1.2 U1.3 U1.4 U1.5 U1.6 U1.7 U1.8 U1.9 U1.10 U1.11 U1.12 U1.13 U1.21 U1.25 U1.36 U1.37 U2.2 U2.3 U2.5

## Polygon pours and split planes (outlines as drawn)
NetDIO4_1 on Bottom Layer "NETDIO4_1_L02_P022" (solid, remove dead copper, pour order 22): 2570,3160.3 2570,3100.04 2670.9,3100.04 2670.9,3160
GND on Bottom Layer "GND_L02_P018" (solid, remove dead copper, pour order 18): 1000,2100 3100,2100 3100,5000 1000,5000
NetDIO3_1 on Bottom Layer "NETDIO3_1_L02_P014" (solid, remove dead copper, pour order 14): 2312,3153.8 2397,3153.8 2397,3073.8 2312,3073.8
NetDIO4_1 on Bottom Layer "NETDIO4_1_L02_P012" (solid, remove dead copper, pour order 12): 2145,3017.8 2230,3017.8 2230,2937.8 2145,2937.8
5V on Bottom Layer "5V_L02_P010" (solid, remove dead copper, pour order 10): 2226.43,2631 2311.43,2631 2311.43,2551 2226.43,2551
NetC11_2 on Bottom Layer "NETC11_2_L02_P008" (solid, remove dead copper, pour order 8): 1990.2,2396 2075.2,2396 2075.2,2316 1990.2,2316
VIN on Bottom Layer "VIN_L02_P006" (solid, remove dead copper, pour order 6): 1848,2236 1933,2236 1933,2156 1848,2156
NetDIO2_1 on Bottom Layer "NETDIO2_1_L02_P004" (solid, remove dead copper, pour order 4): 2312,4673.2 2397,4673.2 2397,4593.2 2312,4593.2
VIN on Bottom Layer "VIN_L02_P002" (solid, remove dead copper, pour order 2): 2312,4942.2 2397,4942.2 2397,4862.2 2312,4862.2
NetDIO1_1 on Bottom Layer "NETDIO1_1_L02_P000" (solid, remove dead copper, pour order 0): 2145,4800 2230,4800 2230,4720 2145,4720
NetDIO4_1 on Top Layer "NETDIO4_1_L01_P020" (solid, remove dead copper, pour order 20): 2580,3259.68 2580,3134.21 2604.21,3110 2640.8,3110 2663.58,3132.78 2663.58,3246.08 2737.41,3319.91 2737.41,3342.72 2725,3355 2668.27,3355 2580,3266.73
GND on Top Layer "GND_L01_P016" (solid, remove dead copper, pour order 16): 1000,2100 3100,2100 3100,5000 1000,5000

## Keep-outs
Keep-Out Layer:
  lines w10: 1000,2100 3100,2100 3100,2480 3100,5000 1000,5000 1000,2430 1000,2100

## Silkscreen, mask and mechanical layers (free items; w line width, h text height)
Top Overlay:
  drawing of 701 lines, arcs and shapes, not listed
  text "SPEED CONTROL PI" at 1240,4840 h50
  text "+" at 2925,4800 h50
  text "M1" at 2785,4390 h50 r90
  text "-" at 2995,4330 h50
  text "+" at 2990,3370 h50
  text "M2" at 2785,3250 h50 r90
  text "-" at 2990,2895 h50
  text "ON" at 1400,2610 h50
  text "+" at 1400,2205 h50
Bottom Overlay:
  text "+" at 2880,4660 h50
  text "-" at 2880,4465 h50
  text "+" at 2885,3230 h50
  text "-" at 2890,3025 h50

## Text inside footprints (layer, text, board x,y; h text height)
C3: Top Overlay "+" at 2622,3331 h25 r180
C4: Top Overlay "+" at 2607.79,4276 h25 r180
C12: Top Overlay "+" at 2186,2177.21 h25 r90
C13: Top Overlay "+" at 2499,2607.79 h25 r270
IC2: Top Overlay "15" at 2790,3575 h25 r270; Top Overlay "1" at 2790,4245 h25 r270
U1: Top Overlay "STM32F401 KIT" at 1330,2760 h59.06 r90